# Altium PCB PlanerInductor.PcbDoc (part 1 of 2)
Units mil, origin at the board's own origin, x right, y up, seen from the top; angles counter-clockwise.
Board outline 3000 x 3000 mil, 4 copper layers (Top Layer, Mid-Layer 1, Mid-Layer 2, Bottom Layer); 105 components, 0 nets, 210 pads, 66 vias.
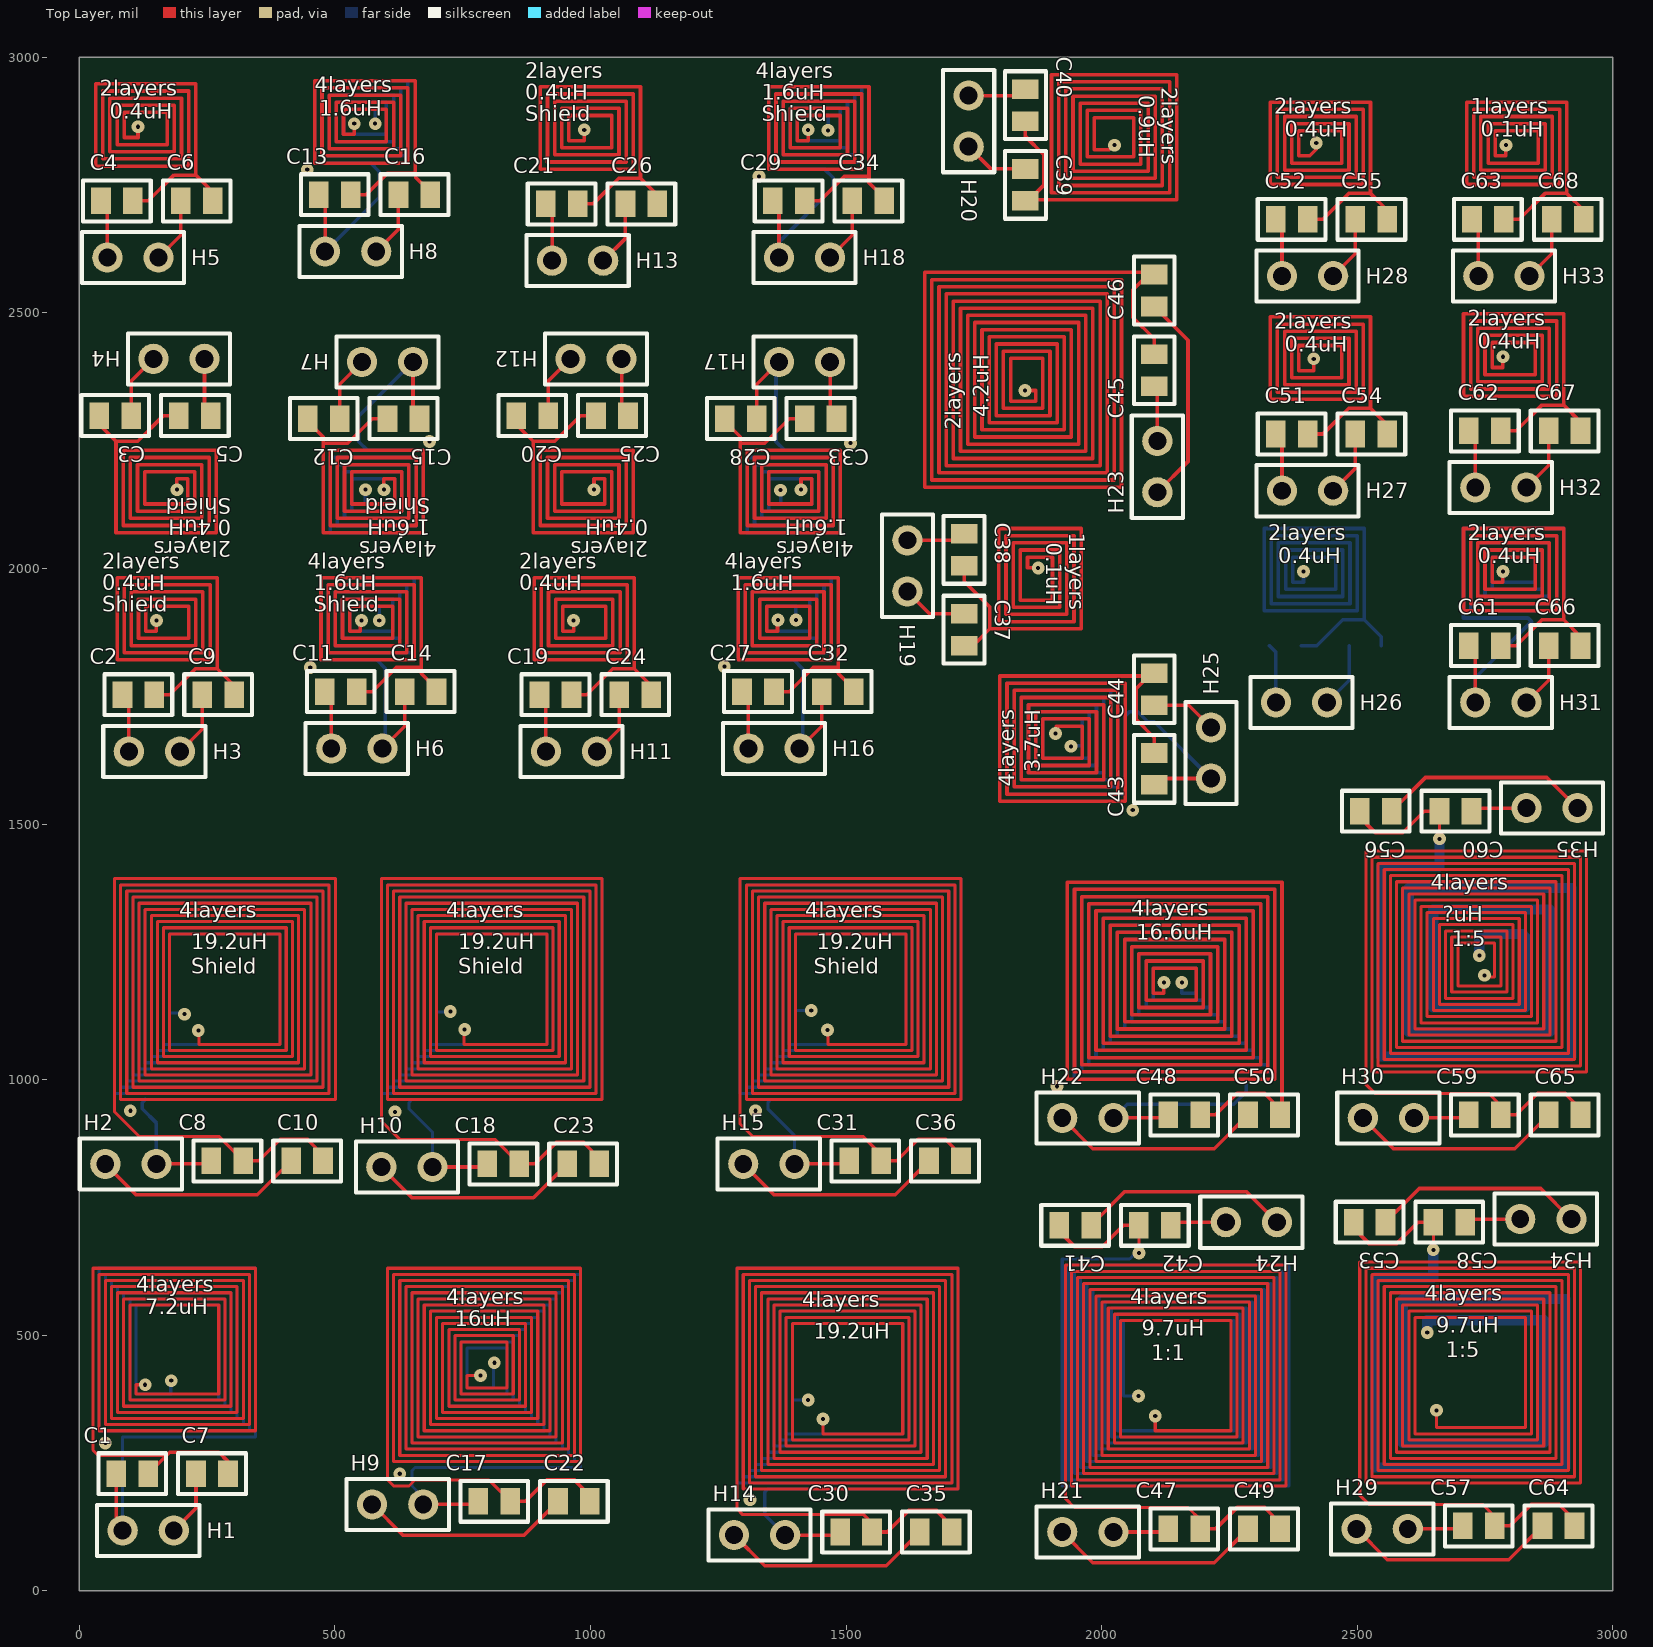
[diagram p0: Top Layer view]
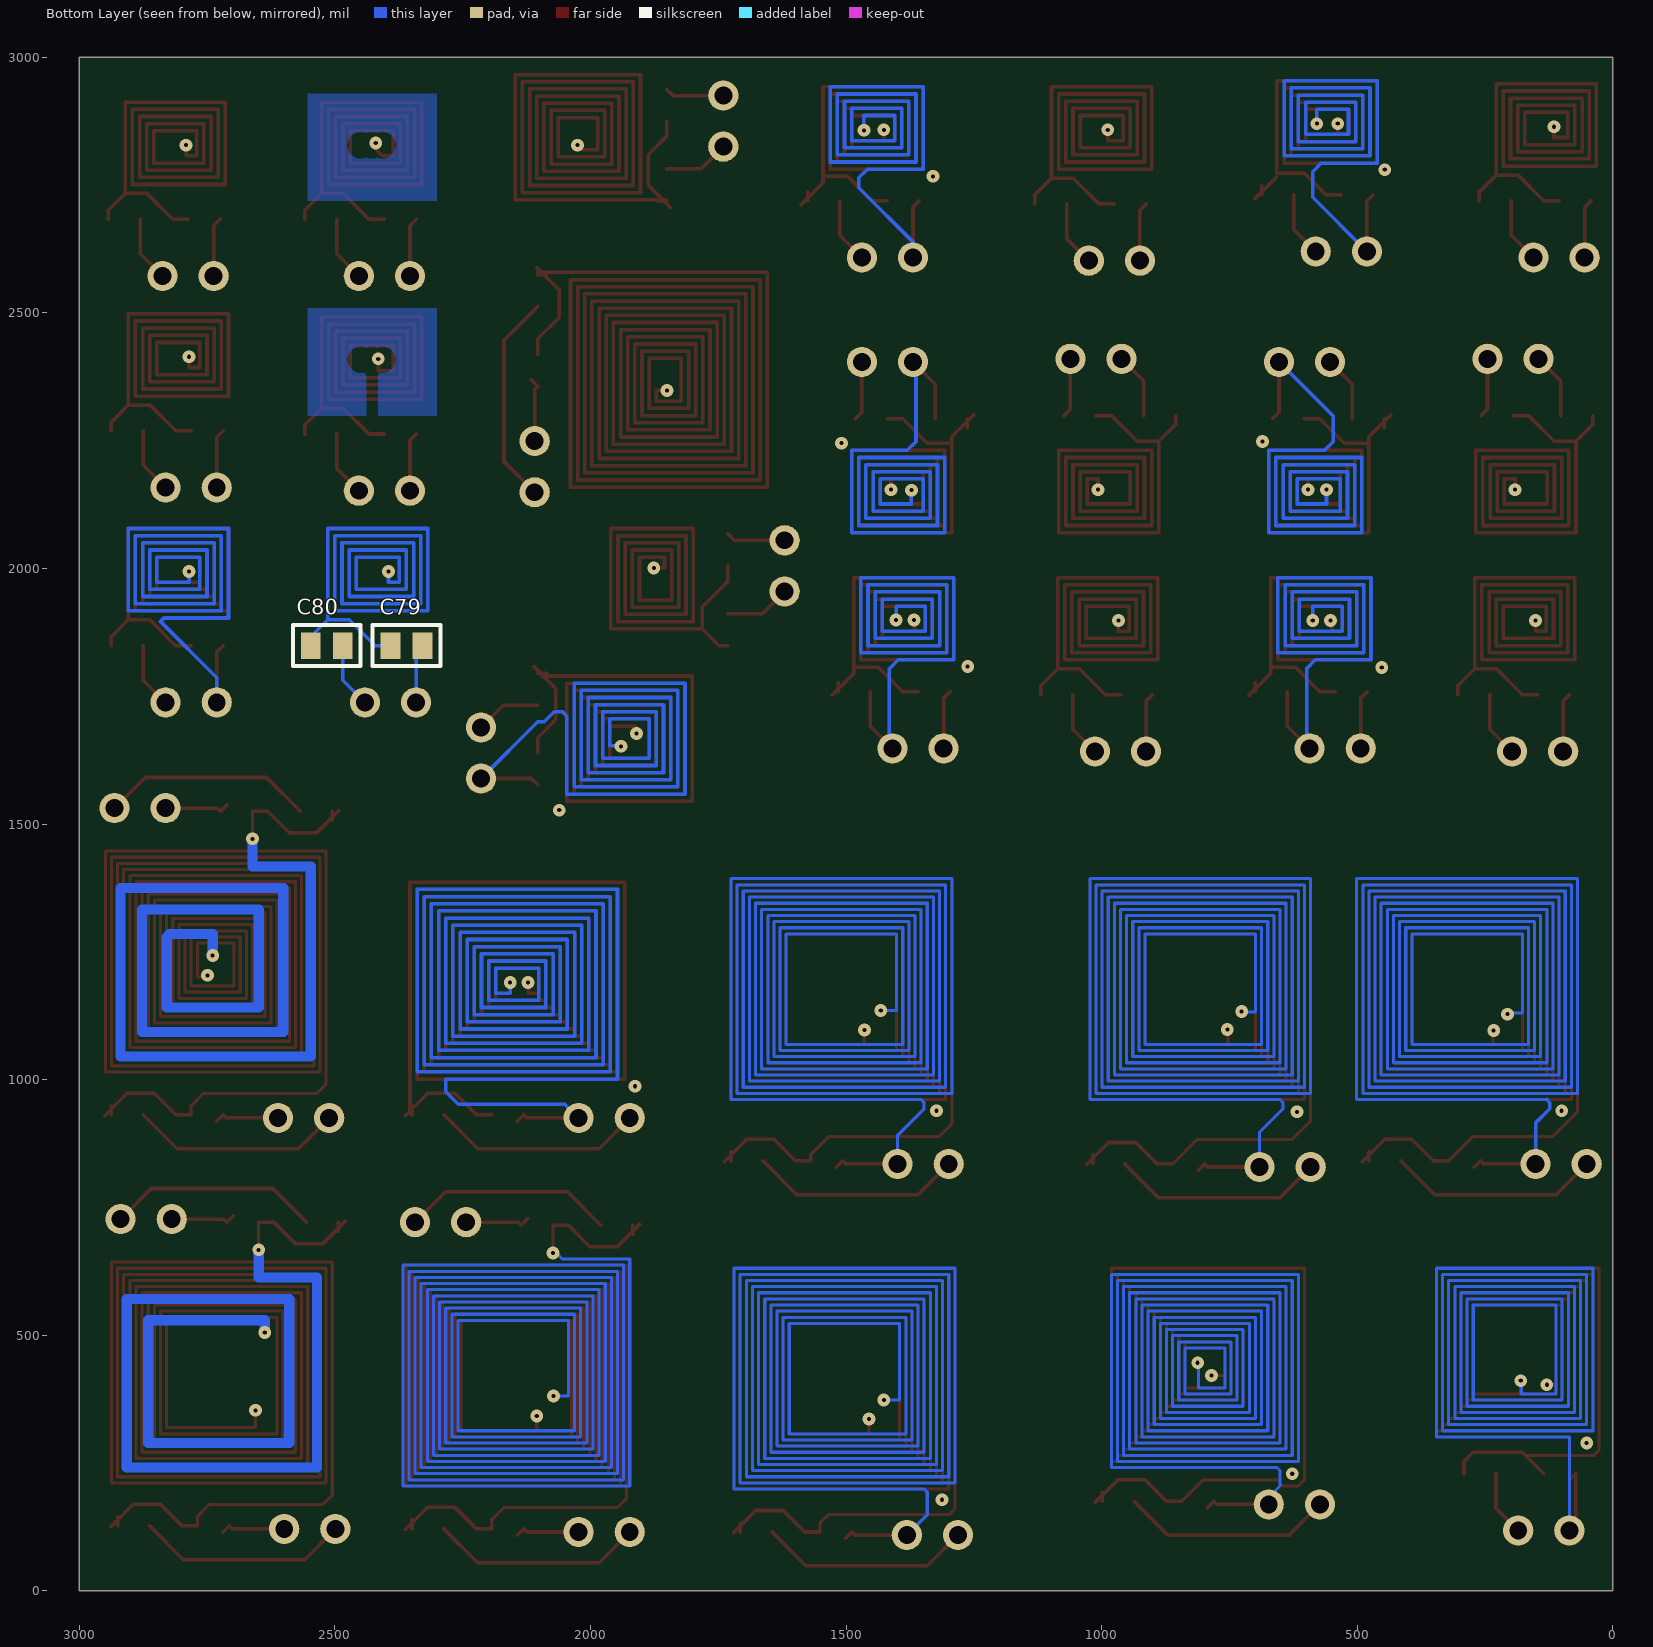
[diagram p1: Bottom Layer view, seen from below]
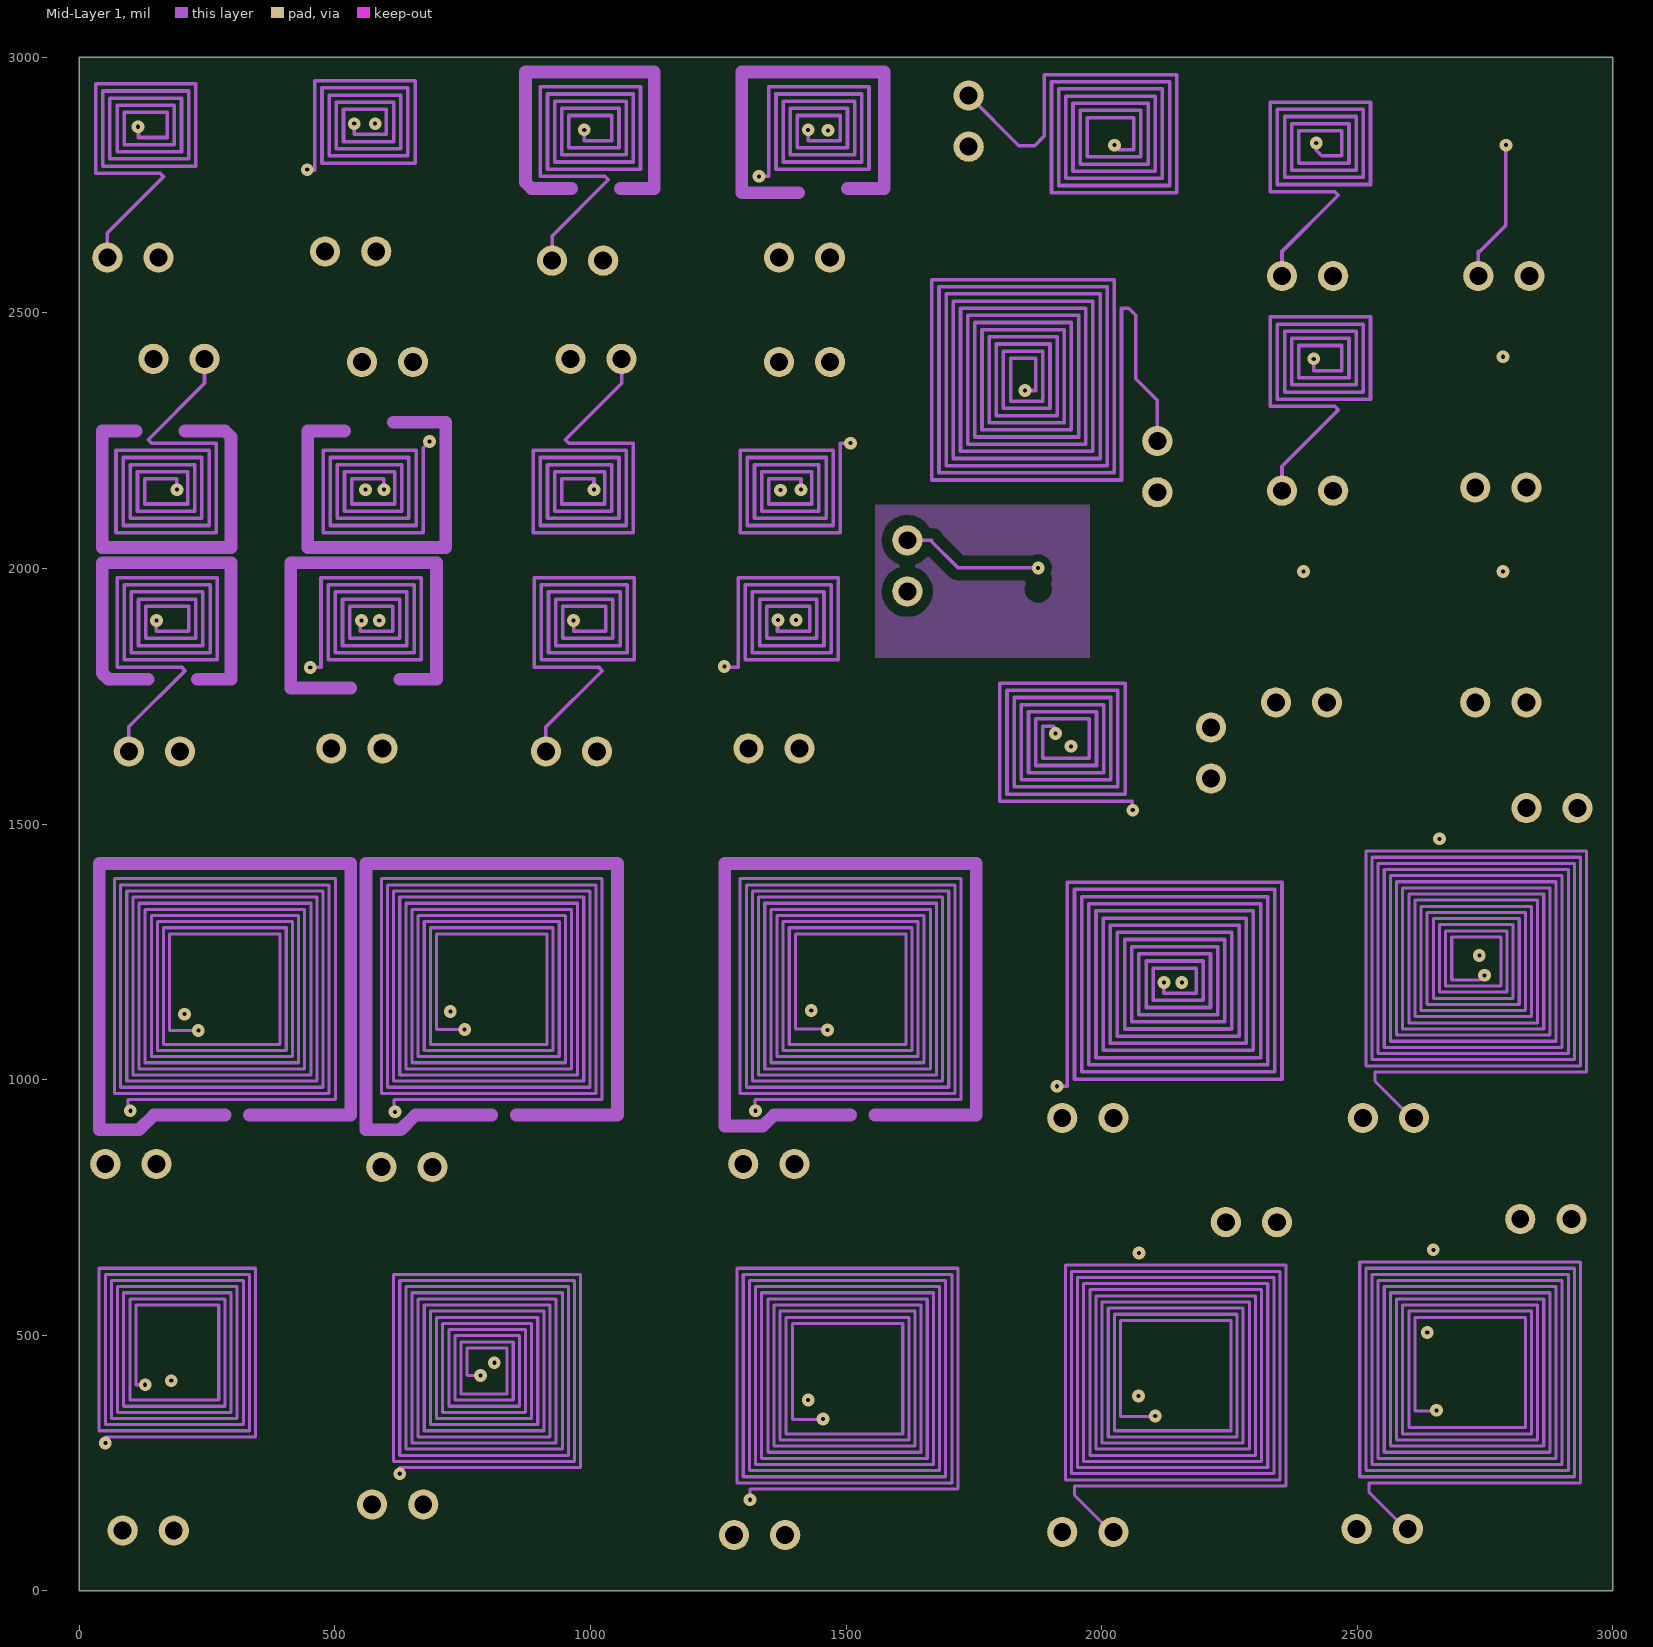
[diagram p2: Mid-Layer 1]
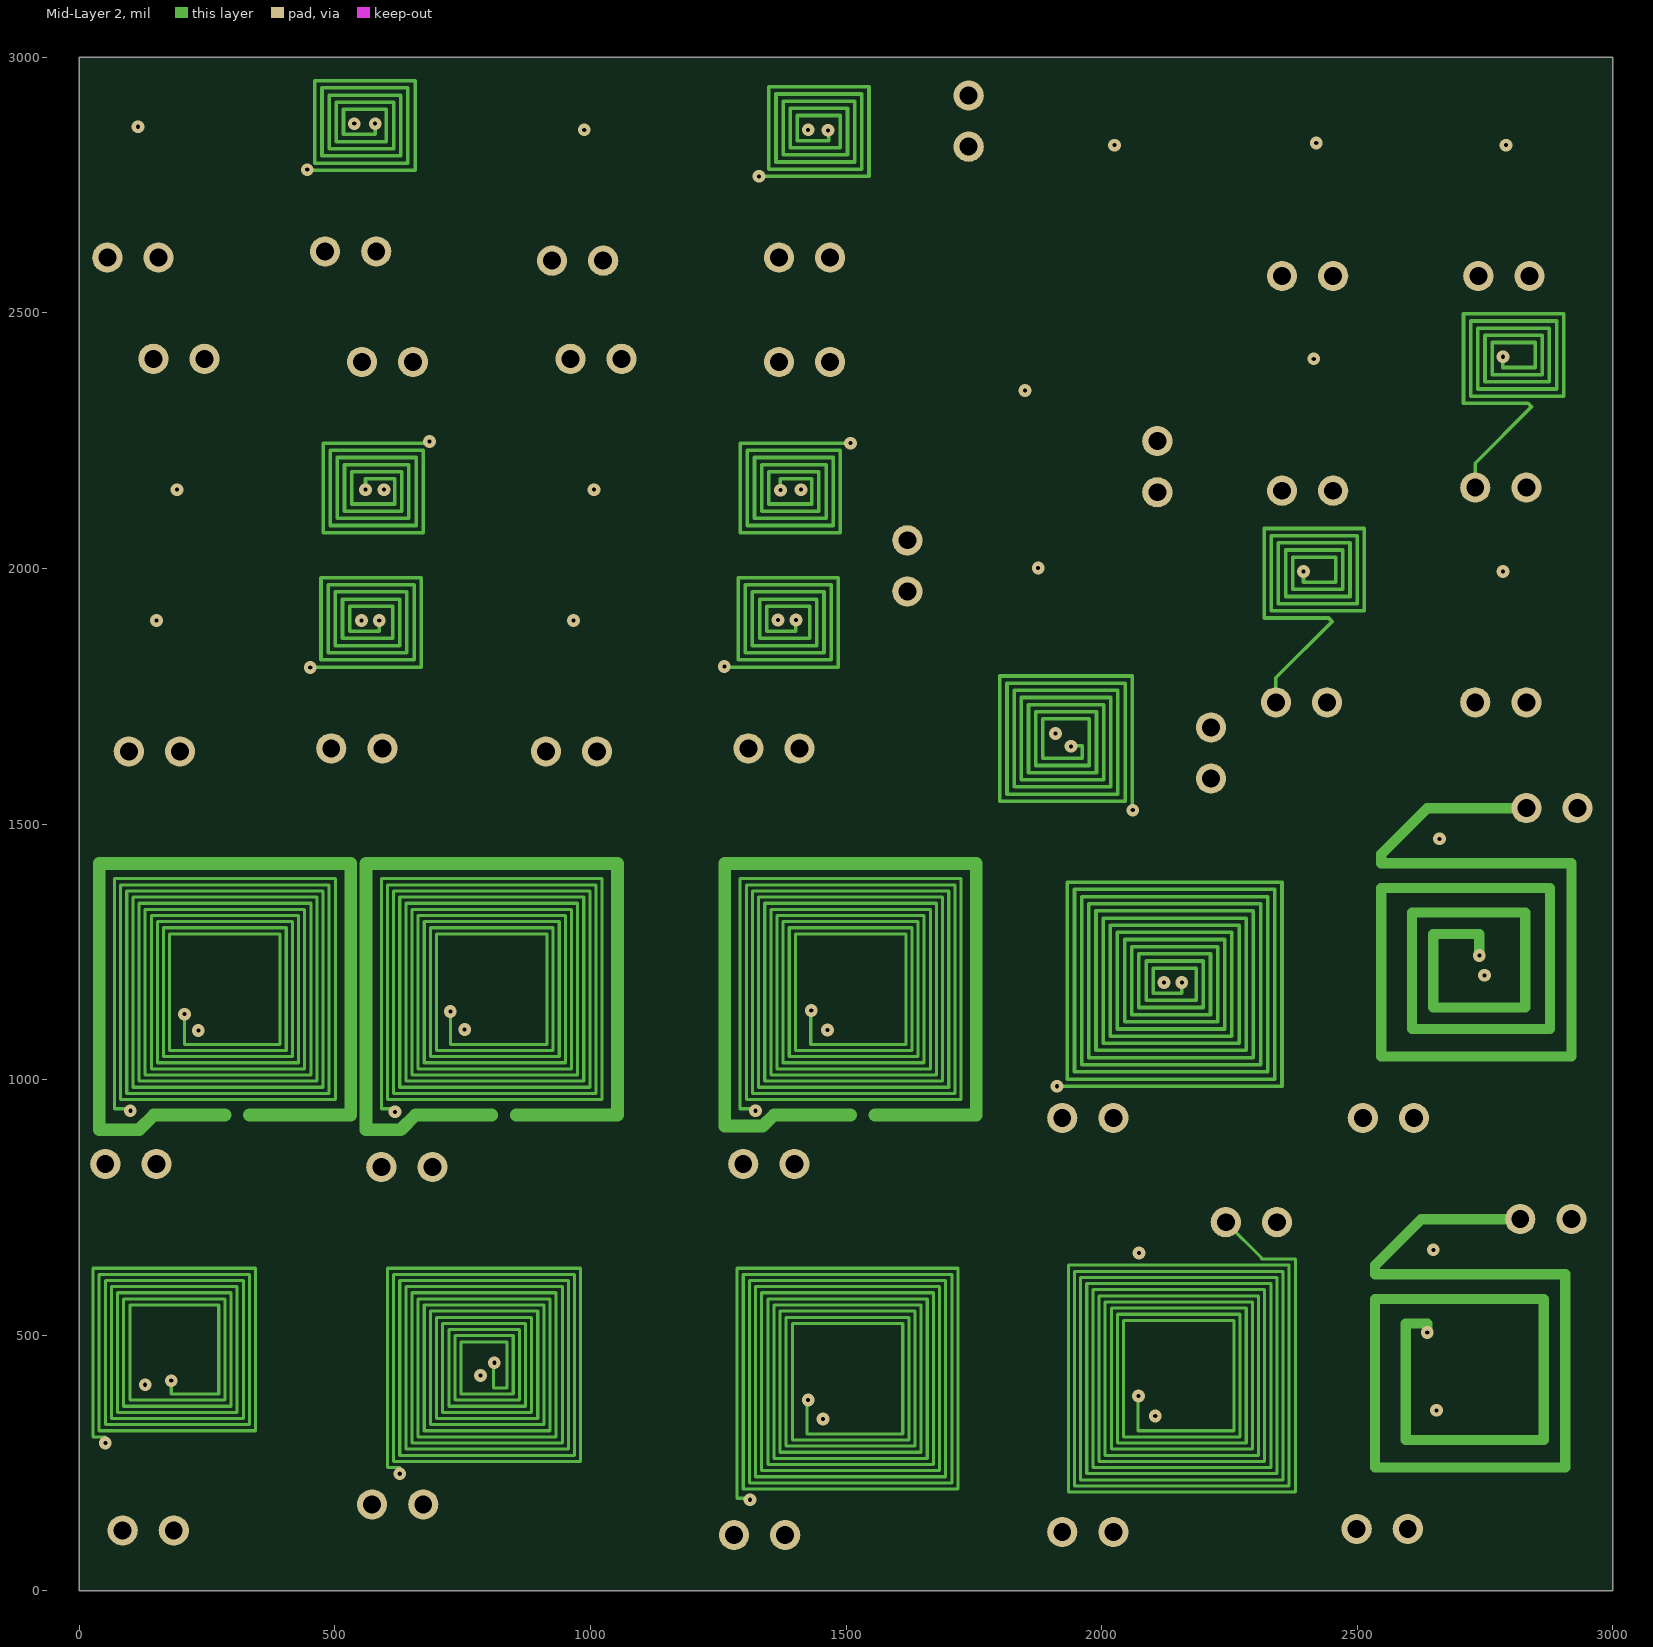
[diagram p3: Mid-Layer 2]

## Layer stack, top to bottom
Top Layer: signal copper 1.4
Dielectric: core 12.6, FR-4, Dk 4.8
Mid-Layer 1: signal copper 1.4
Dielectric: prepreg 12.6, FR-4, Dk 4.8
Mid-Layer 2: signal copper 1.4
Dielectric: core 12.6, FR-4, Dk 4.8
Bottom Layer: signal copper 1.4

## Board outline
0,0 3000,0 3000,3000 0,3000 0,0

## Design rules (kind name [scope] priority, off if disabled: settings)
Clearance [All] p1: gap=20
HoleToHoleClearance [All] p1: gap=6 allowstackedmicrovias=TRUE
MinimumSolderMaskSliver [All] p1: minsoldermaskwidth=6
PolygonConnect [All] p1: connectstyle=Relief reliefconductorwidth=10 reliefentries=4 polygonreliefangle="90 Angle"
RoutingVias [All] p1: holewidth=8 width=12 viastyle="Through Hole" minholewidth=5 minwidth=5 maxholewidth=200 maxwidth=220
ShortCircuit [All] p1 off: allowed=FALSE
SilkToSilkClearance [All] p1: silktosilkclearance=6
SilkscreenOverComponentPads [All] p1: minsilkscreentomaskgap=6
SolderMaskExpansion [All] p1: expansion=2
UnRoutedNet [All] p1 off:
Width [All] p1: maxlimit=100 minlimit=4 preferedwidth=7
22 further rules are at their usual default settings.

## Components (designator, comment, footprint, x,y, rotation, side; value= is the part's Value field where it differs from the comment)
C1 "HPC" 0805 135,229 r180 top
C2 "HPC" 0805 147,1753 r180 top
C3 "HPC" 0805 39,2299 r0 top
C4 "HPC" 0805 105,2719 r180 top
C5 "HPC" 0805 195,2299 r0 top
C6 "HPC" 0805 261,2719 r180 top
C7 "HPC" 0805 291,229 r180 top
C8 "HPC" 0805 321,841 r180 top
C9 "HPC" 0805 303,1753 r180 top
C10 "HPC" 0805 477,841 r180 top
C11 "HPC" 0805 543,1759 r180 top
C12 "HPC" 0805 447,2293 r0 top
C13 "HPC" 0805 531,2731 r180 top
C14 "HPC" 0805 699,1759 r180 top
C15 "HPC" 0805 603,2293 r0 top
C16 "HPC" 0805 687,2731 r180 top
C17 "HPC" 0805 843,175 r180 top
C18 "HPC" 0805 861,835 r180 top
C19 "HPC" 0805 963,1753 r180 top
C20 "HPC" 0805 855,2299 r0 top
C21 "HPC" 0805 975,2713 r180 top
C22 "HPC" 0805 999,175 r180 top
C23 "HPC" 0805 1017,835 r180 top
C24 "HPC" 0805 1119,1753 r180 top
C25 "HPC" 0805 1011,2299 r0 top
C26 "HPC" 0805 1131,2713 r180 top
C27 "HPC" 0805 1359,1759 r180 top
C28 "HPC" 0805 1263,2293 r0 top
C29 "HPC" 0805 1419,2719 r180 top
C30 "HPC" 0805 1551,115 r180 top
C31 "HPC" 0805 1569,841 r180 top
C32 "HPC" 0805 1515,1759 r180 top
C33 "HPC" 0805 1419,2293 r0 top
C34 "HPC" 0805 1575,2719 r180 top
C35 "HPC" 0805 1707,115 r180 top
C36 "HPC" 0805 1725,841 r180 top
C37 "HPC" 0805 1731,1849 r90 top
C38 "HPC" 0805 1731,2005 r90 top
C39 "HPC" 0805 1851,2719 r90 top
C40 "HPC" 0805 1851,2875 r90 top
C41 "HPC" 0805 1917,715 r0 top
C42 "HPC" 0805 2073,715 r0 top
C43 "HPC" 0805 2103,1639 r270 top
C44 "HPC" 0805 2103,1795 r270 top
C45 "HPC" 0805 2103,2419 r270 top
C46 "HPC" 0805 2103,2575 r270 top
C47 "HPC" 0805 2193,121 r180 top
C48 "HPC" 0805 2193,931 r180 top
C49 "HPC" 0805 2349,121 r180 top
C50 "HPC" 0805 2349,931 r180 top
C51 "HPC" 0805 2403,2263 r180 top
C52 "HPC" 0805 2403,2683 r180 top
C53 "HPC" 0805 2493,721 r0 top
C54 "HPC" 0805 2559,2263 r180 top
C55 "HPC" 0805 2559,2683 r180 top
C56 "HPC" 0805 2505,1525 r0 top
C57 "HPC" 0805 2769,127 r180 top
C58 "HPC" 0805 2649,721 r0 top
C59 "HPC" 0805 2781,931 r180 top
C60 "HPC" 0805 2661,1525 r0 top
C61 "HPC" 0805 2781,1849 r180 top
C62 "HPC" 0805 2781,2269 r180 top
C63 "HPC" 0805 2787,2683 r180 top
C64 "HPC" 0805 2925,127 r180 top
C65 "HPC" 0805 2937,931 r180 top
C66 "HPC" 0805 2937,1849 r180 top
C67 "HPC" 0805 2937,2269 r180 top
C68 "HPC" 0805 2943,2683 r180 top
C79 "HPC" 0805 2328.5,1849 r0 bottom
C80 "HPC" 0805 2484.5,1849 r0 bottom
H1 "HPC" HDR1X2 85,118 r0 top
H2 "HPC" HDR1X2 51,835 r0 top
H3 "HPC" HDR1X2 97,1642 r0 top
H4 "HPC" HDR1X2 245,2410 r180 top
H5 "HPC" HDR1X2 55,2608 r0 top
H6 "HPC" HDR1X2 493,1648 r0 top
H7 "HPC" HDR1X2 653,2404 r180 top
H8 "HPC" HDR1X2 481,2620 r0 top
H9 "HPC" HDR1X2 573,169 r0 top
H10 "HPC" HDR1X2 591,829 r0 top
H11 "HPC" HDR1X2 913,1642 r0 top
H12 "HPC" HDR1X2 1061,2410 r180 top
H13 "HPC" HDR1X2 925,2602 r0 top
H14 "HPC" HDR1X2 1281,109 r0 top
H15 "HPC" HDR1X2 1299,835 r0 top
H16 "HPC" HDR1X2 1309,1648 r0 top
H17 "HPC" HDR1X2 1469,2404 r180 top
H18 "HPC" HDR1X2 1369,2608 r0 top
H19 "HPC" HDR1X2 1620,2055 r270 top
H20 "HPC" HDR1X2 1740,2925 r270 top
H21 "HPC" HDR1X2 1923,115 r0 top
H22 "HPC" HDR1X2 1923,925 r0 top
H23 "HPC" HDR1X2 2109,2149 r90 top
H24 "HPC" HDR1X2 2343,721 r180 top
H25 "HPC" HDR1X2 2214,1589 r90 top
H26 "HPC" HDR1X2 2341,1738 r0 top
H27 "HPC" HDR1X2 2353,2152 r0 top
H28 "HPC" HDR1X2 2353,2572 r0 top
H29 "HPC" HDR1X2 2499,121 r0 top
H30 "HPC" HDR1X2 2511,925 r0 top
H31 "HPC" HDR1X2 2731,1738 r0 top
H32 "HPC" HDR1X2 2731,2158 r0 top
H33 "HPC" HDR1X2 2737,2572 r0 top
H34 "HPC" HDR1X2 2919,727 r180 top
H35 "HPC" HDR1X2 2931,1531 r180 top

## Footprints (in the part's own frame and the unit in brackets; to place one, negate y for a bottom-side part, rotate by r counter-clockwise, add the part's x,y. Pads: shape width x height; smd on the part's side, far side on the other; paste and mask are expansions set on the pad)
0805 [mil]
  rect 38.5x52 smd: 1(0,0) 2(62.5,0)
  silkscreen extent -35,-40 98,40
HDR1X2 [mm]
  round 1.5 hole 0.889: 1(0,0) 2(2.54,0)
  silkscreen extent -1.27,-1.27 3.81,1.27

## Via types
v1: diameter 25, hole 8, Top Layer to Bottom Layer, 66 vias

## Nets (pads, with @x,y where several pads share a name; then routed paths per layer and width w, separated by ;. In a path a pad name is that pad's centre, name@x,y a point inside that pad or via, vN(x,y) a via of type N, cw(c..) or ccw(c..) an arc to the next point about the centre after c; other vN are vias at no path point)
pads on no net: C1.1 C1.2 C2.1 C2.2 C3.1 C3.2 C4.1 C4.2 C5.1 C5.2 C6.1 C6.2 C7.1 C7.2 C8.1 C8.2 C9.1 C9.2 C10.1 C10.2 C11.1 C11.2 C12.1 C12.2 C13.1 C13.2 C14.1 C14.2 C15.1 C15.2 C16.1 C16.2 C17.1 C17.2 C18.1 C18.2 C19.1 C19.2 C20.1 C20.2 C21.1 C21.2 C22.1 C22.2 C23.1 C23.2 C24.1 C24.2 C25.1 C25.2 C26.1 C26.2 C27.1 C27.2 C28.1 C28.2 C29.1 C29.2 C30.1 C30.2 C31.1 C31.2 C32.1 C32.2 C33.1 C33.2 C34.1 C34.2 C35.1 C35.2 C36.1 C36.2 C37.1 C37.2 C38.1 C38.2 C39.1 C39.2 C40.1 C40.2 C41.1 C41.2 C42.1 C42.2 C43.1 C43.2 C44.1 C44.2 C45.1 C45.2 C46.1 C46.2 C47.1 C47.2 C48.1 C48.2 C49.1 C49.2 C50.1 C50.2 C51.1 C51.2 C52.1 C52.2 C53.1 C53.2 C54.1 C54.2 C55.1 C55.2 C56.1 C56.2 C57.1 C57.2 C58.1 C58.2 C59.1 C59.2 C60.1 C60.2 C61.1 C61.2 C62.1 C62.2 C63.1 C63.2 C64.1 C64.2 C65.1 C65.2 C66.1 C66.2 C67.1 C67.2 C68.1 C68.2 C79.1 C79.2 C80.1 C80.2 H1.1 H1.2 H2.1 H2.2 H3.1 H3.2 H4.1 H4.2 H5.1 H5.2 H6.1 H6.2 H7.1 H7.2 H8.1 H8.2 H9.1 H9.2 H10.1 H10.2 H11.1 H11.2 H12.1 H12.2 H13.1 H13.2 H14.1 H14.2 H15.1 H15.2 H16.1 H16.2 H17.1 H17.2 H18.1 H18.2 H19.1 H19.2 H20.1 H20.2 H21.1 H21.2 H22.1 H22.2 H23.1 H23.2 H24.1 H24.2 H25.1 H25.2 H26.1 H26.2 H27.1 H27.2 H28.1 H28.2 H29.1 H29.2 H30.1 H30.2 H31.1 H31.2 H32.1 H32.2 H33.1 H33.2 H34.1 H34.2 H35.1 H35.2